# EAGLE board v (EAGLE 7.1.0)
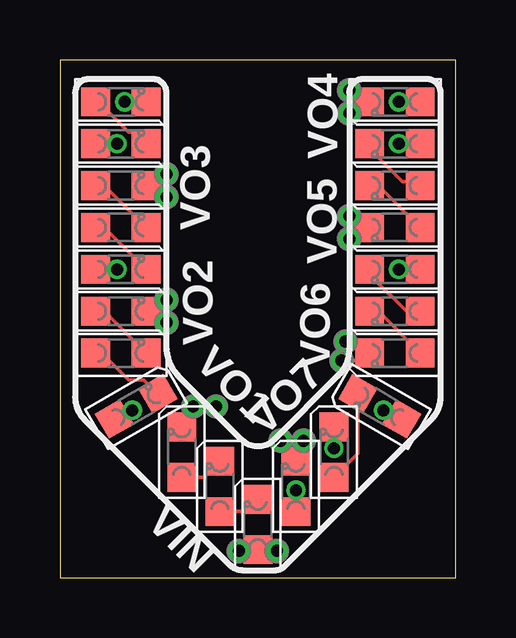
[diagram p0: board, top side]
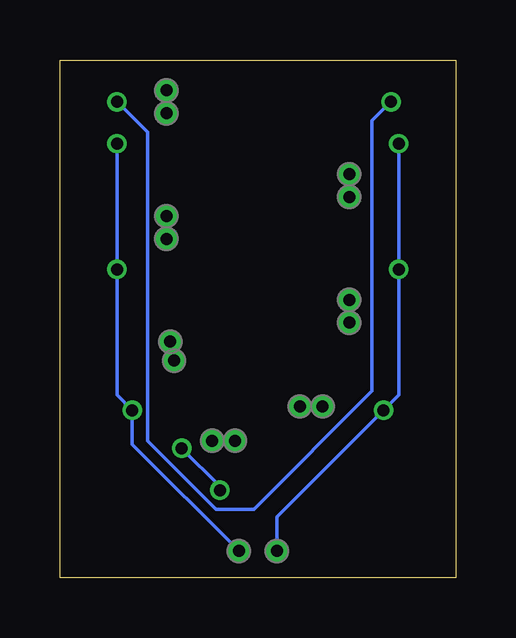
[diagram p1: board, bottom side, seen from below]

Size 16.51 x 21.59 mm. Coordinates in mm from the lower left corner, seen from the top.
Outline: 0,0 16.51,0 16.51,21.59 0,21.59 0,0
Copper layers (1*16): Top 0.035mm / dielectric 1.5mm / Bottom 0.035mm
Design rules "Fusion_eagle_rule_v1.1_tms *": minimum track width 6mil, minimum drill 12mil, track to track 6mil, track to pad 6mil, pad to pad 6mil, via to via 6mil, smd to smd 0mil, copper to edge 10mil, drill to drill 10mil, minimum pad ring 10mil, minimum via ring 6mil, stop-mask expansion 2mil, vias tented up to drill 100mil, thermal gap 10mil

## Footprints (pad centres in the part's own frame; a part is rotated, then mirrored left to right if it is on the bottom)
LED_0805 = smd 1.2 x 1.2: A 0,-1.05; C 0,1.05
P1-20 = drill 0.5: TP 0,0

## Placement (x,y rotation side)
LED1  [LED_0805]  8.26,2.22 0 top
LED2  [LED_0805]  6.67,3.81 0 top
LED3  [LED_0805]  5.08,5.24 0 top
LED4  [LED_0805]  3.17,7.14 300 top
LED5  [LED_0805]  2.54,9.37 270 top
LED6  [LED_0805]  2.54,11.11 270 top
LED7  [LED_0805]  2.54,12.86 270 top
LED8  [LED_0805]  2.54,14.61 270 top
LED9  [LED_0805]  2.54,16.35 270 top
LED10  [LED_0805]  2.54,18.1 270 top
LED11  [LED_0805]  2.54,19.84 270 top
LED12  [LED_0805]  13.97,19.84 90 top
LED13  [LED_0805]  13.97,18.1 90 top
LED14  [LED_0805]  13.97,16.35 90 top
LED15  [LED_0805]  13.97,14.61 90 top
LED16  [LED_0805]  13.97,12.86 90 top
LED17  [LED_0805]  13.97,11.11 90 top
LED18  [LED_0805]  13.97,9.37 90 top
LED19  [LED_0805]  13.34,7.14 60 top
LED20  [LED_0805]  11.43,5.24 0 top
LED21  [LED_0805]  9.84,3.81 0 top
VIN  [P1-20]  7.46,1.11 0 top
VIN1  [P1-20]  9.05,1.11 0 top
VO1  [P1-20]  6.51,7.14 0 top
VO2  [P1-20]  4.45,10.64 0 top
VO3  [P1-20]  4.45,16.83 0 top
VO4  [P1-20]  12.06,20.32 0 top
VO5  [P1-20]  12.06,15.08 0 top
VO6  [P1-20]  11.91,9.84 0 top
VO7  [P1-20]  10.16,5.71 0 top
VO8  [P1-20]  5.56,7.14 0 top
VO9  [P1-20]  4.45,11.59 0 top
VO10  [P1-20]  4.45,15.88 0 top
VO11  [P1-20]  12.06,19.37 0 top
VO12  [P1-20]  12.06,14.13 0 top
VO13  [P1-20]  11.75,9.05 0 top
VO14  [P1-20]  9.21,5.71 0 top

## Library data of the parts
LED1-LED21 VIN VIN1 VO1-VO14 = CyberRailGuru

## Nets
N$3: LED2.C LED3.A
N$4: LED1.C LED2.A
N$7: LED5.C LED6.A
N$8: LED4.C LED5.A
N$11: LED8.C LED9.A
N$12: LED7.C LED8.A
N$15: LED11.C LED12.A
N$16: LED10.C LED11.A
N$19: LED14.C LED15.A
N$20: LED13.C LED14.A
N$23: LED17.C LED18.A
N$24: LED16.C LED17.A
N$27: LED20.C LED21.A
N$28: LED19.C LED20.A
VIN: LED1.A LED4.A LED7.A LED10.A LED13.A LED16.A LED19.A VIN1.TP VIN.TP
VOUT1: LED3.C VO1.TP VO8.TP
VOUT2: LED6.C VO2.TP VO9.TP
VOUT3: LED9.C VO3.TP VO10.TP
VOUT4: LED12.C VO4.TP VO11.TP
VOUT5: LED15.C VO5.TP VO12.TP
VOUT6: LED18.C VO6.TP VO13.TP
VOUT7: LED21.C VO7.TP VO14.TP

## Tracks (layer width: path | path; a pad name or v marks a point on that pad's centre or on a via)
N$3
  Top 0.152: LED3.A 6,4.19 LED2.C
N$4
  Top 0.152: LED2.A 7.74,2.76 LED1.C
N$7
  Top 0.152: LED6.A 1.84,11.11 LED5.C
N$8
  Top 0.152: LED5.A 1.75,9.37 2.86,8.26 3.5,8.26 LED4.C
N$11
  Top 0.152: LED9.A 1.84,16.35 LED8.C
N$12
  Top 0.152: LED8.A 1.84,14.61 LED7.C
N$15  (via drill 0.5)
  Top 0.152: LED11.C v2.7,19.84 | v14.13,19.84 LED12.A
  Bottom 0.152: v2.7,19.84 3.49,19.05 3.49,7.78 8.41,2.86 10,2.86 12.86,5.71 12.86,18.57 v14.13,19.84
N$16
  Top 0.152: LED11.A 1.59,19.84 2.86,18.57 3.11,18.57 LED10.C
N$19
  Top 0.152: LED14.C 13.27,16.35 LED15.A
N$20
  Top 0.152: LED13.C 12.92,17.88 14.29,16.51 14.86,16.51 LED14.A
N$23
  Top 0.152: LED17.C 13.27,11.11 LED18.A
N$24
  Top 0.152: LED16.C 12.92,12.48 13.08,12.48 14.45,11.11 LED17.A
N$27  (via drill 0.5)
  Top 0.152: LED21.A v9.84,3.65 | v11.43,5.4 LED20.C
  Bottom 0.152: v9.84,3.65 9.84,3.81 v11.43,5.4
N$28
  Top 0.152: LED19.C 12.43,5.18 LED20.A
VIN  (via drill 0.5)
  Top 0.152: VIN.TP 8.19,1.11 LED1.A 8.32,1.11 VIN1.TP | LED4.A 2.65,6.62 v3.02,6.99 | LED7.A v2.38,12.86 | LED10.A v2.38,18.1 | LED13.A v14.13,18.1 | LED16.A v14.13,12.86 | LED19.A 13.86,6.62 v13.49,6.99
  Bottom 0.152: v2.38,18.1 v2.38,12.86 2.38,7.62 v3.02,6.99 7.46,2.54 VIN.TP | v14.13,18.1 v14.13,12.86 14.13,7.62 v13.49,6.99 13.49,5.56 VIN1.TP
VOUT1
  Top 0.152: LED3.C 5.56,6.76 VO8.TP VO1.TP
VOUT2
  Top 0.152: VO2.TP 4.07,10.64 LED6.C 4.07,11.59 VO9.TP
VOUT3
  Top 0.152: VO3.TP 4.07,16.83 LED9.C 4.07,15.88 VO10.TP
VOUT4
  Top 0.152: VO11.TP 12.44,19.37 LED12.C 12.44,20.32 VO4.TP
VOUT5
  Top 0.152: VO5.TP 12.44,15.08 LED15.C 12.44,14.13 VO12.TP
VOUT6
  Top 0.152: VO6.TP 12.7,9.84 12.7,9.59 LED18.C 12.6,9.05 VO13.TP
VOUT7
  Top 0.152: VO14.TP 9.21,5.5 LED21.C 10.16,5.18 VO7.TP

## Text on the board
201bmp: V